# EAGLE board openLRS-APM (EAGLE 7.1.0)
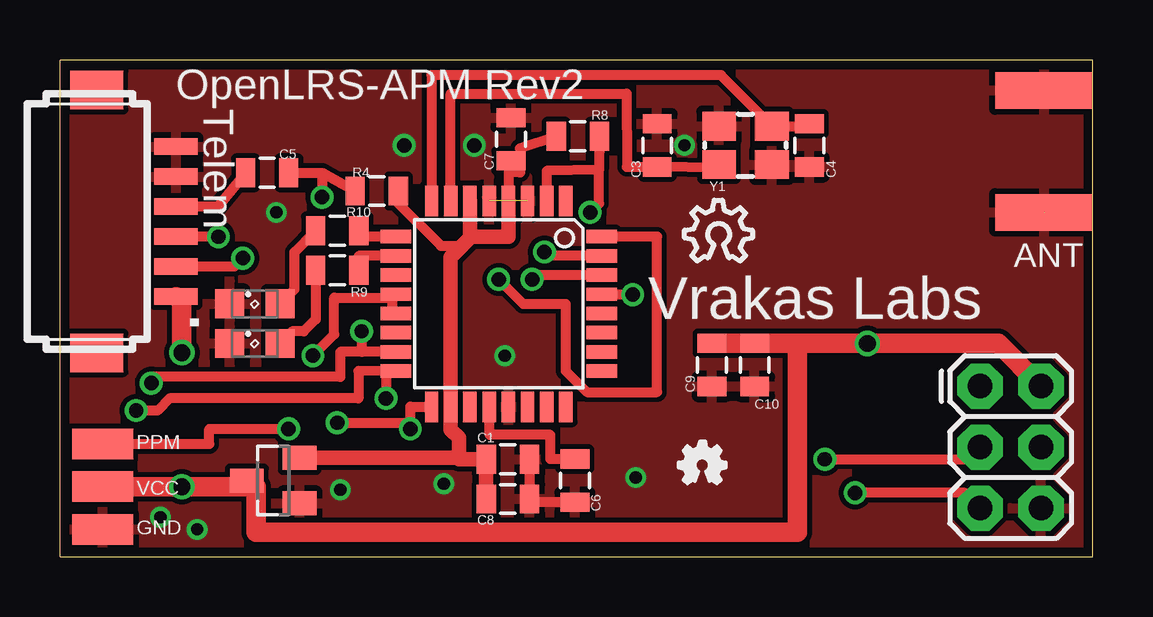
[diagram p0: board, top side]
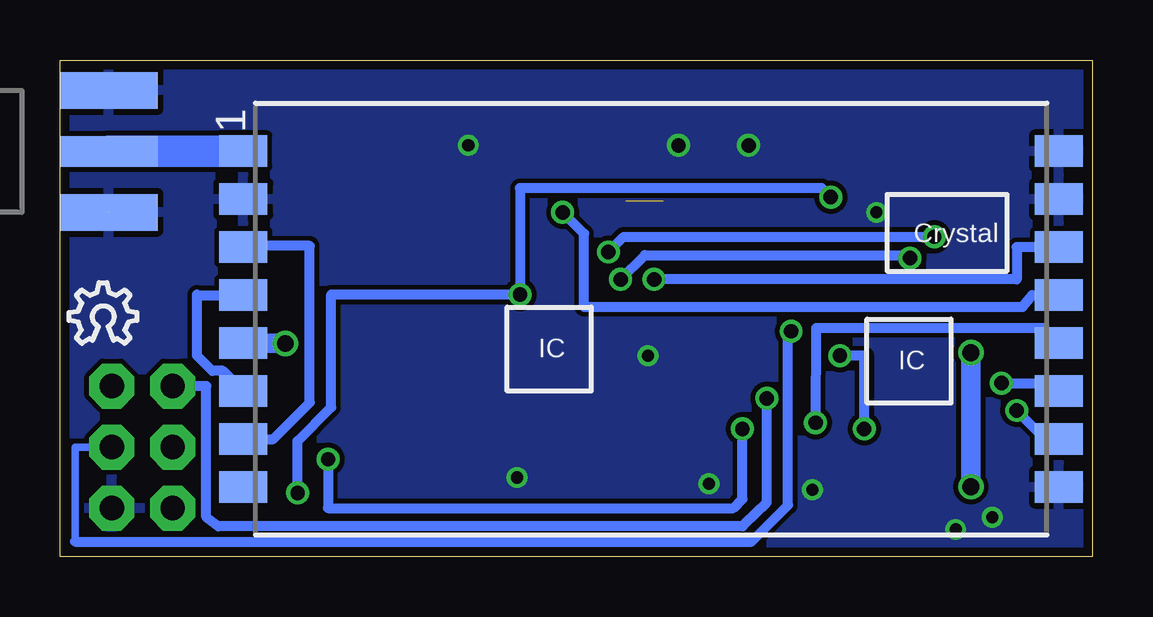
[diagram p1: board, bottom side, seen from below]

Size 43.05 x 20.7 mm. Coordinates in mm from the lower left corner, seen from the top.
Outline: 0,0 0,20.7 43.05,20.7 43.05,0 0,0
Copper layers (1*16): Top 0.0356mm / dielectric 1.5011mm / Bottom 0.0356mm
Design rules "oshpark-2layer": minimum track width 6mil, minimum drill 13mil, track to track 6mil, track to pad 6mil, pad to pad 6mil, via to via 6mil, smd to smd 6mil, copper to edge 15mil, drill to drill 6mil, minimum pad ring 7mil, minimum via ring 7mil, stop-mask expansion 4mil, vias tented up to drill 0mil, thermal gap 10mil
Net classes: 0 default: clearance 0.205 mm

## Footprints (pad centres in the part's own frame; a part is rotated, then mirrored left to right if it is on the bottom)
0805 = smd 0.8 x 1.2: 1 -0.9,0; 2 0.9,0
SMD1,27-2,54 = smd 1.27 x 2.54: 1 0,0
SOT23 = smd 1 x 1.4: 1 -0.95,-1.1; 2 0.95,-1.1; 3 0,1.1
RFM23BP-S2 = smd 2 x 1.3: 1 -17,7; 2 -17,5; 3 -17,3; 4 -17,1; 5 -17,-1; 6 -17,-3; 7 -17,-5; 8 -17,-7; 9 17,-7; 10 17,-5; 11 17,-3; 12 17,-1; 13 17,1; 14 17,3; 15 17,5; 16 17,7
2X3 = drill 1.016 pad 1.88 octagon: 1 0,0; 2 0,2.54; 3 2.54,0; 4 2.54,2.54; 5 5.08,0; 6 5.08,2.54
SML0805 = smd 1.2 x 1.2: A 1.05,0; C -1.05,0
SMA_EDGELAUNCH = smd 4.064 x 1.524: GND@1 2.032,-2.54; GND@2 2.032,2.54 | smd 4.064 x 1.524 bottom: GND@3 2.032,2.54; GND@4 2.032,-2.54 | smd 4.064 x 1.27: P 2.032,0
DF13A-6P-1.25H = smd 1.6 x 2.2: M$0 -5.475,2.4; M$1 5.475,2.4 | smd 0.7 x 1.8: P$1 -3.125,-0.9; P$2 -1.875,-0.9; P$3 -0.625,-0.9; P$4 0.625,-0.9; P$5 1.875,-0.9; P$6 3.125,-0.9
TQFP32-08 = smd 1.27 x 0.559: 1 -4.293,2.8; 2 -4.293,2; 3 -4.293,1.2; 4 -4.293,0.4; 5 -4.293,-0.4; 6 -4.293,-1.2; 7 -4.293,-2; 8 -4.293,-2.8; 17 4.293,-2.8; 18 4.293,-2; 19 4.293,-1.2; 20 4.293,-0.4; 21 4.293,0.4; 22 4.293,1.2; 23 4.293,2; 24 4.293,2.8 | smd 0.559 x 1.27: 9 -2.8,-4.293; 10 -2,-4.293; 11 -1.2,-4.293; 12 -0.4,-4.293; 13 0.4,-4.293; 14 1.2,-4.293; 15 2,-4.293; 16 2.8,-4.293; 25 2.8,4.293; 26 2,4.293; 27 1.2,4.293; 28 0.4,4.293; 29 -0.4,4.293; 30 -1.2,4.293; 31 -2,4.293; 32 -2.8,4.293
CRYSTAL-SMD-5X3 = smd 1.4 x 1.2: 1 -1.1,-0.8; 2 1.1,-0.8; 3 1.1,0.8; 4 -1.1,0.8

## Placement (x,y rotation side)
C1  1uF  [0805]  18.67,4.06 0 top
C3  12pF  [0805]  24.89,17.14 90 top
C4  12pF  [0805]  31.24,17.14 270 top
C5  100n  [0805]  8.64,16 0 top
C6  100n  [0805]  21.46,3.17 90 top
C7  100n  [0805]  18.8,17.4 90 top
C8  100n  [0805]  18.67,2.41 0 top
C9  1uF  [0805]  27.18,8 270 top
C10  100n  [0805]  28.96,8 270 top
GND  [SMD1,27-2,54]  1.78,1.14 270 top
IC1  MCP1703CB  [SOT23]  8.89,3.17 90 top
IC2  RFM23BPSMD  [RFM23BP-S2]  18.41,9.91 0 bottom
J1  AVR_SPI_PRG_6PTH  [2X3]  38.35,7.11 270 top
LED1  RED  [SML0805]  8.13,8.89 0 top
LED2  GRN  [SML0805]  8.13,10.54 0 top
PPM  [SMD1,27-2,54]  1.78,4.7 90 top
R4  10k  [0805]  13.21,15.24 0 top
R8  1k  [0805]  21.59,17.53 180 top
R9  220  [0805]  11.56,11.94 0 top
R10  220  [0805]  11.56,13.59 0 top
SMA  [SMA_EDGELAUNCH]  43.05,16.89 0 bottom
TELEMETRY  DF13-6P-1.25H  [DF13A-6P-1.25H]  3.94,13.97 90 top
U1  ATMEGA328P  [TQFP32-08]  18.29,10.54 270 top
U$1  [OSHW_FILLX70_NOTEXT]  25.78,3.05 0 top
U$2  [OSHW_8X100_NOTEXT]  26.04,12.32 0 top
U$3  [OSHW_8X100_NOTEXT]  42.67,8.89 0 bottom
VCC  [SMD1,27-2,54]  1.78,2.92 270 top
Y1  16MHz  [CRYSTAL-SMD-5X3]  28.57,17.14 180 top

## Library data of the parts
C1 C3-C10 = SparkFun-Capacitors
GND PPM VCC = wirepad
IC1 = linear
IC2 = RFM23
J1 = SparkFun-Connectors
LED1 LED2 = led
R4 R8-R10 = SparkFun-Resistors
SMA = adafruit
TELEMETRY = con-hirose-df13
U1 = SparkFun-DigitalIC; PROD_ID: IC-09069
U$1-U$3 = ohw-logo
Y1 = crystal_3225

## Nets
3V: C1.1 C7.1 C8.1 IC1.2 R4.2 R8.2 U1.4 U1.6 U1.18
5V: C9.1 C10.1 IC1.3 IC2.5 J1.2 TELEMETRY.P$1 VCC.1
/RESET: C5.2 J1.5 R4.1 U1.29
DTR: C5.1 TELEMETRY.P$4
GND: C1.2 C3.2 C4.2 C6.1 C7.2 C8.2 C9.2 C10.2 GND.1 IC1.1 IC2.2 IC2.9 IC2.15 IC2.16 J1.6 LED1.C LED2.C SMA.GND@1 SMA.GND@2 SMA.GND@3 SMA.GND@4 TELEMETRY.P$5 TELEMETRY.P$6 U1.3 U1.5 U1.21 Y1.2 Y1.4
MISO: IC2.10 J1.1 U1.16
MOSI: IC2.11 J1.4 U1.15
N$1: IC2.3 IC2.7
N$2: IC2.4 IC2.6
N$7: R9.2 U1.10
N$8: R10.2 U1.9
N$9: LED2.A R10.1
N$10: LED1.A R9.1
N$11: C3.1 U1.7 Y1.3
N$12: C4.1 U1.8 Y1.1
N$13: IC2.1 SMA.P
N$14: C6.2 U1.20
PPM: PPM.1 U1.12 U1.13
RF_CS: IC2.13 R8.1 U1.2
RF_IRQ: IC2.14 U1.32
RXD: TELEMETRY.P$2 U1.30
SCK: IC2.12 J1.3 U1.17
TXD: TELEMETRY.P$3 U1.31

## Tracks (layer width: path | path; a pad name or v marks a point on that pad's centre or on a via)
3V
  Top 0.406: R4.2 14.11,14.72 15.88,12.95 16.76,12.95 | C7.1 18.8,16.13 18.7,16.02 | 18.7,16.02 U1.4 | R8.2 19.18,17.02 19.18,16.02 | 19.18,16.02 | 19.18,16.02 18.7,16.02
  Top 0.61: IC1.2 16.64,4.12 | 16.64,4.12 16.64,4.06 C1.1 C8.1 | 16.64,4.12 16.64,4.95 16.29,5.3 U1.18 16.29,12.48 16.76,12.95 17.14,13.34 | U1.4 18.69,13.34 17.14,13.34 | 17.14,13.34 17.09,13.39 U1.6
5V  (via drill 0.7)
  Top 0.813: VCC.1 v5.08,2.92 8.17,2.92 | IC1.3 8.17,2.92 | 8.17,2.92 8.17,1.02 30.73,1.02 30.73,8.89 | 30.73,8.89 v33.66,8.89 39.12,8.89 J1.2 | TELEMETRY.P$1 5.08,10.6 v5.08,8.51 | 30.73,8.89 C10.1 C9.1
  Bottom 0.813: v33.66,8.89 33.67,8.91 IC2.5 | v5.08,8.51 v5.08,2.92
/RESET  (via drill 0.6)
  Top 0.406: J1.5 37.72,2.67 v33.15,2.67 | C5.2 10.92,16 | U1.29 24.13,10.94 v23.88,10.92 | R4.1 10.92,16 | 10.92,16 v10.92,14.99
  Bottom 0.406: v33.15,2.67 33.15,4.83 31.75,6.22 31.75,10.92 v23.88,10.92 23.88,15.37 11.3,15.37 v10.92,14.99
DTR
  Top 0.406: C5.1 6.58,14.6 TELEMETRY.P$4
GND  (via drill 0.51, 0.6)  (2 unrouted)
  Top 0.406: C6.1 19.57,2.27 C8.2 C1.2
  Bottom 0.203: 1.42,16.89 IC2.16
  other vias: 14.35,17.14 26.04,17.14 24,3.3 16,3.05 18.54,8.38 9.02,14.35 4.19,1.65 5.71,1.14 11.68,2.79 17.27,17.14
  pour Top: -2.79,27.3 58.17,27.3 58.17,1.4 58.17,-5.46 -4.06,-5.46 -4.06,27.43 -3.17,27.43 -3.17,27.3
  pour Bottom: -4.57,25.78 54.86,25.78 54.86,11.3 54.86,-3.43 -6.86,-3.43 -6.86,25.78
MISO  (via drill 0.6)
  Top 0.406: v13.59,6.6 13.59,7.75 13.84,7.74 U1.16 12.45,7.75 12.45,6.6 4.58,6.6 4.57,6.6 4.06,6.1 v3.17,6.1
  Bottom 0.406: J1.1 36.96,7.11 36.96,1.65 36.45,1.27 14.61,1.27 14.5,1.37 13.59,2.26 v13.59,6.6 | IC2.10 1.99,4.91 v3.17,6.1
MOSI  (via drill 0.6)
  Top 0.406: U1.15 12.57,8.54 | 12.57,8.54 11.68,8.54 11.68,7.49 3.81,7.49 v3.81,7.24 | v12.57,9.4 12.57,8.54
  Bottom 0.305: J1.4 42.42,4.57 42.42,0.64
  Bottom 0.406: 1.49,6.99 IC2.11 1.42,7.24 v3.81,7.24 | 42.42,0.64 14.22,0.64 12.7,2.16 12.7,9.27 v12.57,9.4
N$1
  Bottom 0.406: IC2.7 34.16,4.91 32.64,6.43 32.64,12.95 35.41,12.95 IC2.3
N$2
  Bottom 0.406: IC2.6 36.26,7.75 36.7,7.75 37.34,8.38 37.34,10.92 37.32,10.91 IC2.4
N$7
  Top 0.406: U1.10 12.46,12.54 R9.2
N$8
  Top 0.406: U1.9 12.58,13.34 R10.2
N$9
  Top 0.406: LED2.A 9.78,11.14 9.78,12.7 10.66,13.58 R10.1
N$10
  Top 0.406: R9.1 10.66,9.89 10.16,9.4 9.69,9.4 LED1.A
N$11
  Top 0.406: Y1.3 27.43,16.22 C3.1 23.63,16.25 23.62,19.3 16.29,19.3 U1.7
N$12
  Top 0.406: C4.1 31.24,17.95 Y1.1 27.55,20.07 15.49,20.07 U1.8
N$13
  Bottom 1.321: IC2.1 SMA.P
N$14
  Top 0.406: C6.2 20.45,4.08 20.45,5.08 17.91,5.08 17.91,5.21 U1.20
PPM  (via drill 0.6)
  Top 0.406: v9.53,5.33 6.22,5.33 6.22,4.7 PPM.1 | v10.54,8.38 11.43,9.27 11.43,10.79 13.85,10.79 | 13.85,10.79 U1.12 | 13.85,10.79 13.85,10.29 U1.13
  Bottom 0.406: v9.53,5.33 9.53,8.38 v10.54,8.38
RF_CS  (via drill 0.6)
  Top 0.406: U1.2 20.29,16.09 22.48,16.13 R8.1 22.48,14.73 v22.1,14.35
  Bottom 0.406: IC2.13 2.52,10.91 2.92,10.41 21.21,10.41 21.21,13.46 v22.1,14.35
RF_IRQ  (via drill 0.6)
  Top 0.406: v18.29,11.56 19.3,10.54 21.08,10.54 21.08,7.75 21.97,6.86 24.89,6.86 24.89,13.34 U1.32
  Bottom 0.406: IC2.14 3.17,12.91 3.17,11.56 v18.29,11.56
RXD  (via drill 0.6)
  Top 0.406: U1.30 19.87,11.74 v19.68,11.56 | v7.62,12.45 7.27,12.1 TELEMETRY.P$2
  Bottom 0.406: v19.68,11.56 18.67,12.57 7.75,12.57 v7.62,12.45
SCK  (via drill 0.6)
  Top 0.406: v31.88,4.06 37.85,4.06 J1.3 | 15.49,6.22 U1.17 14.61,6.25 14.61,5.59 | v11.56,5.59 14.61,5.59 | 14.61,5.59 v14.61,5.33
  Bottom 0.406: 2.17,8.91 IC2.12 2.05,9.54 11.54,9.54 v11.56,5.59 | v31.88,4.06 31.88,2.03 14.99,2.03 14.61,2.41 v14.61,5.33
TXD  (via drill 0.6)
  Top 0.406: U1.31 20.32,12.54 v20.19,12.7 | v6.6,13.34 v6.59,13.35 TELEMETRY.P$3
  Bottom 0.406: v20.19,12.7 19.56,13.34 v6.6,13.34

## Text on the board
tPlace: OpenLRS-APM Rev2 | Vrakas Labs
tNames: Telem | ANT
bNames: 1